# Altium PCB atmegashied.PcbDoc
Units mil, origin at the board's own origin, x right, y up, seen from the top; angles counter-clockwise.
Board outline 1930 x 2465 mil, 2 copper layers (Top Layer, Bottom Layer); 112 components, 70 nets, 712 pads, 0 vias.
Unrouted connection lines stored in the file: 2.
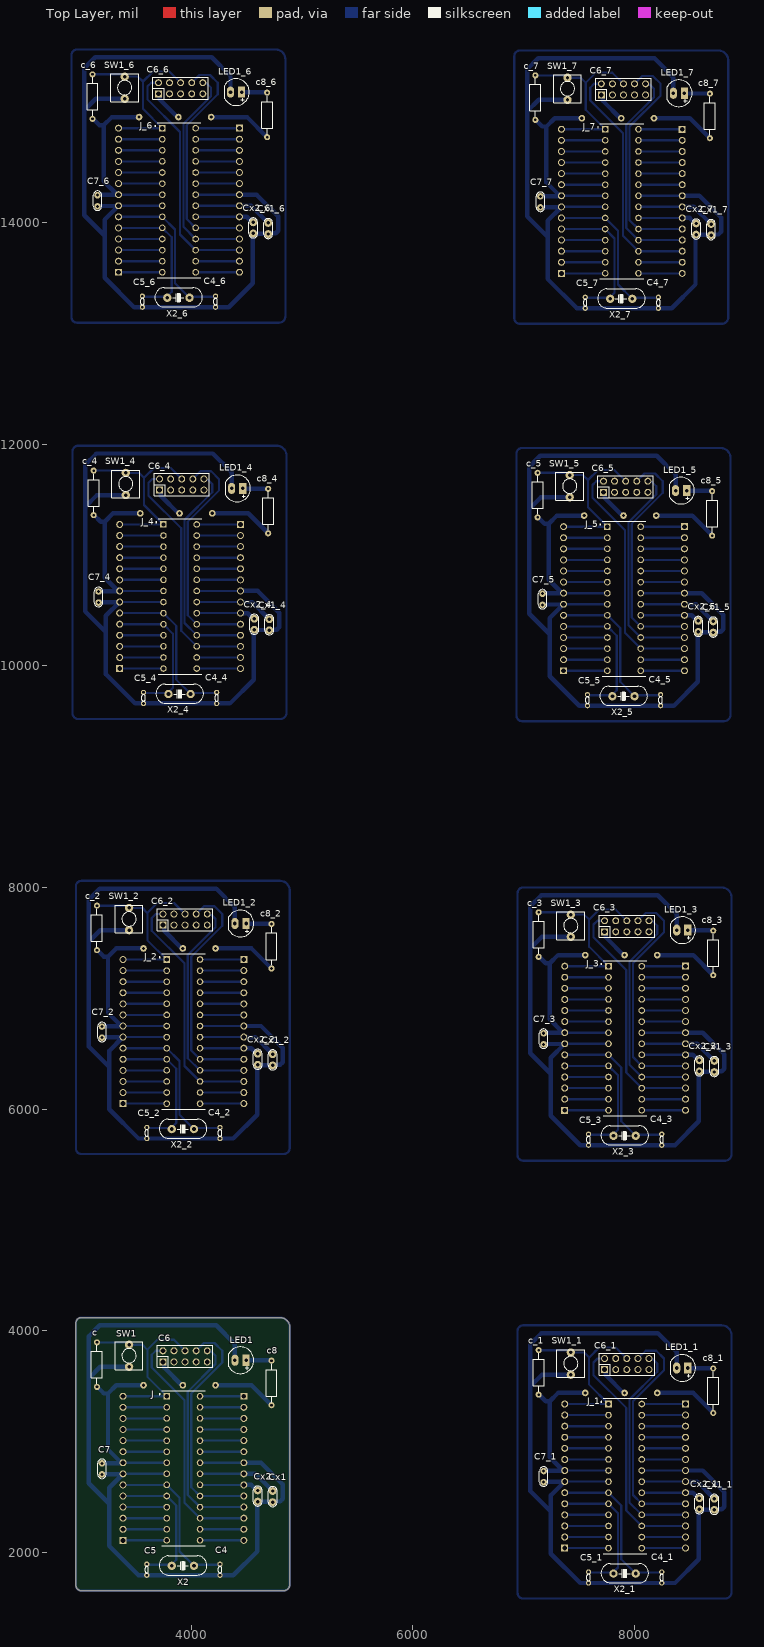
[diagram p0: Top Layer view]
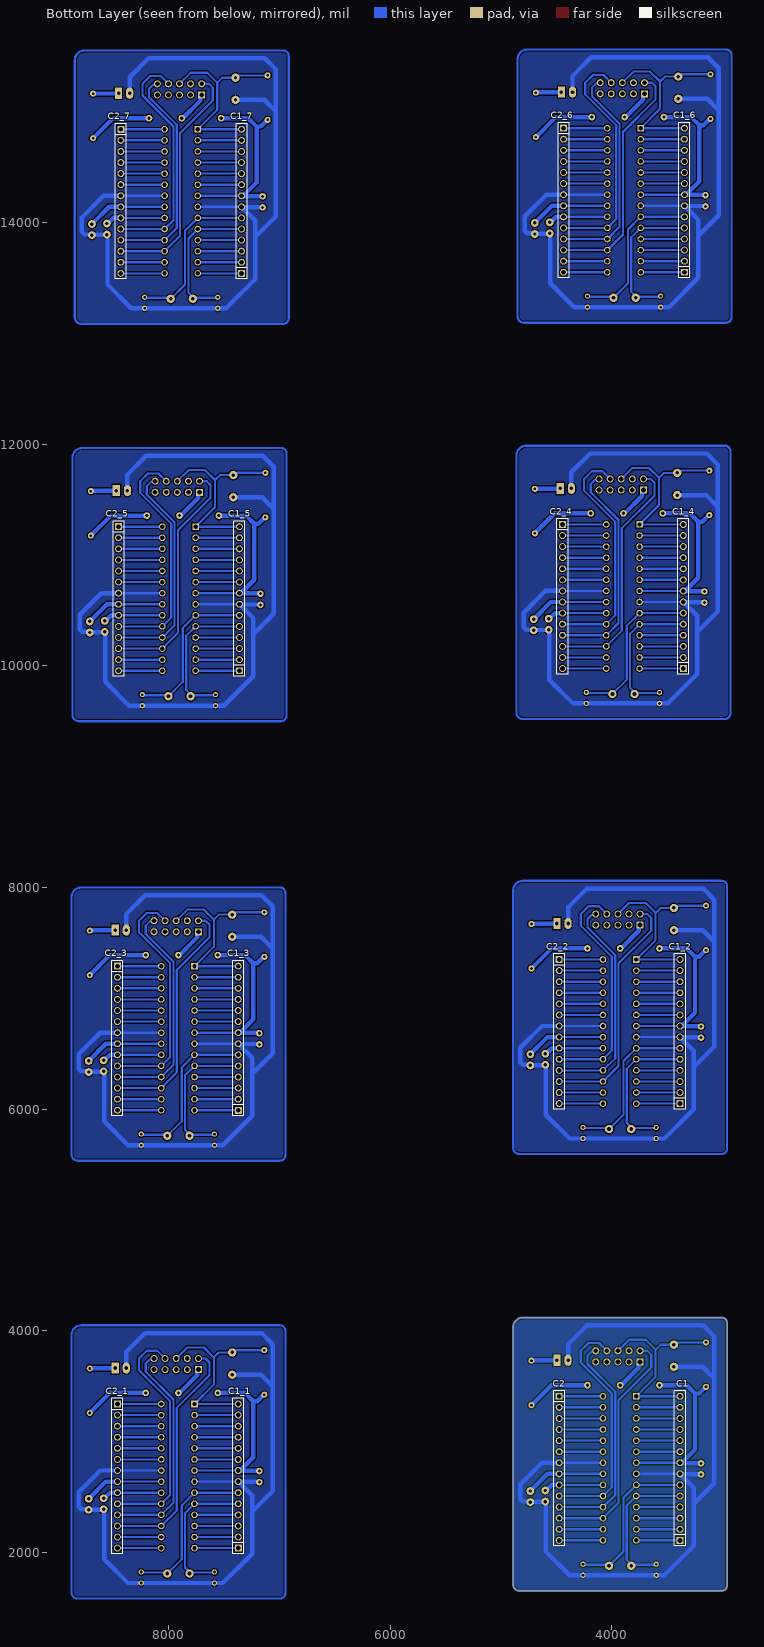
[diagram p1: Bottom Layer view, seen from below]

## Layer stack, top to bottom
Top Solder: solder mask 0.4, Solder Resist, Dk 3.5
Top Layer: signal copper 1.4
Dielectric 1: dielectric 12.6, FR-4, Dk 4.8
Bottom Layer: signal copper 1.4
Bottom Solder: solder mask 0.4, Solder Resist, Dk 3.5

## Board outline
2960,1705 ccw(c3010,1705) 3010,1655 4832.6,1655 ccw(c4832.6,1712.4) 4890,1712.4 4890,4030.51 ccw(c4800.52,4030.51) 4800.52,4119.99 3010,4120 ccw(c3010,4070) 2960,4070

## Design rules (kind name [scope] priority, off if disabled: settings)
Clearance [All] p1: gap=10 ignorepadtopadclearanceinfootprint=FALSE except(0: Arc-Hole Track-Hole SMDPad-Hole THPad-Hole Via-Hole Fill-Hole Poly-Hole Region-Hole Text-Hole)
PolygonConnect [All] p1: connectstyle=Relief reliefconductorwidth=10 reliefentries=4 polygonreliefangle="90 Angle" airgapwidth=10
RoutingVias [All] p1: holewidth=28 width=50 viastyle="Through Hole" minholewidth=28 minwidth=50 maxholewidth=28 maxwidth=50
SolderMaskExpansion [All] p1: expansion=4 istentingtop=FALSE
Width [All] p1: maxlimit=10 minlimit=10 preferedwidth=10
30 further rules are at their usual default settings.

## Classes and differential pairs
component class Tien: c C1 C2 C4 C5 C6 C7 c8 Cx1 Cx2 J LED1 SW1 X2

## Components (designator, comment, footprint, x,y, rotation, side; value= is the part's Value field where it differs from the comment)
c "100K" "tro vach 1/4w" 3150,3695 r270 top
C1 "JP14" JP14-D1T 3385,2110 r90 bottom
C1_1 "JP14" JP14-D1T 7370,2040 r90 bottom (schematic designator C1)
C1_2 "JP14" JP14-D1T 3385,6050 r90 bottom (schematic designator C1)
C1_3 "JP14" JP14-D1T 7370,5990 r90 bottom (schematic designator C1)
C1_4 "JP14" JP14-D1T 3355,9975 r90 bottom (schematic designator C1)
C1_5 "JP14" JP14-D1T 7360,9955 r90 bottom (schematic designator C1)
C1_6 "JP14" JP14-D1T 3345,13550 r90 bottom (schematic designator C1)
C1_7 "JP14" JP14-D1T 7340,13540 r90 bottom (schematic designator C1)
C2 "JP14" JP14-D1T 4475,3410 r270 bottom
C2_1 "JP14" JP14-D1T 8460,3340 r270 bottom (schematic designator C2)
C2_2 "JP14" JP14-D1T 4475,7350 r270 bottom (schematic designator C2)
C2_3 "JP14" JP14-D1T 8460,7290 r270 bottom (schematic designator C2)
C2_4 "JP14" JP14-D1T 4445,11275 r270 bottom (schematic designator C2)
C2_5 "JP14" JP14-D1T 8450,11255 r270 bottom (schematic designator C2)
C2_6 "JP14" JP14-D1T 4435,14850 r270 bottom (schematic designator C2)
C2_7 "JP14" JP14-D1T 8430,14840 r270 bottom (schematic designator C2)
C4 "MH" Tu-pico 4260,1895 r270 top value=33p
C4_1 "MH" Tu-pico 8245,1825 r270 top value=33p (schematic designator C4)
C4_2 "MH" Tu-pico 4260,5835 r270 top value=33p (schematic designator C4)
C4_3 "MH" Tu-pico 8245,5775 r270 top value=33p (schematic designator C4)
C4_4 "MH" Tu-pico 4230,9760 r270 top value=33p (schematic designator C4)
C4_5 "MH" Tu-pico 8235,9740 r270 top value=33p (schematic designator C4)
C4_6 "MH" Tu-pico 4220,13335 r270 top value=33p (schematic designator C4)
C4_7 "MH" Tu-pico 8215,13325 r270 top value=33p (schematic designator C4)
C5 "MH" Tu-pico 3600,1895 r270 top value=33p
C5_1 "MH" Tu-pico 7585,1825 r270 top value=33p (schematic designator C5)
C5_2 "MH" Tu-pico 3600,5835 r270 top value=33p (schematic designator C5)
C5_3 "MH" Tu-pico 7585,5775 r270 top value=33p (schematic designator C5)
C5_4 "MH" Tu-pico 3570,9760 r270 top value=33p (schematic designator C5)
C5_5 "MH" Tu-pico 7575,9740 r270 top value=33p (schematic designator C5)
C5_6 "MH" Tu-pico 3560,13335 r270 top value=33p (schematic designator C5)
C5_7 "MH" Tu-pico 7555,13325 r270 top value=33p (schematic designator C5)
C6 "JP5x2" JP5-D2T 3945,3770 r0 top
C6_1 "JP5x2" JP5-D2T 7930,3700 r0 top (schematic designator C6)
C6_2 "JP5x2" JP5-D2T 3945,7710 r0 top (schematic designator C6)
C6_3 "JP5x2" JP5-D2T 7930,7650 r0 top (schematic designator C6)
C6_4 "JP5x2" JP5-D2T 3915,11635 r0 top (schematic designator C6)
C6_5 "JP5x2" JP5-D2T 7920,11615 r0 top (schematic designator C6)
C6_6 "JP5x2" JP5-D2T 3905,15210 r0 top (schematic designator C6)
C6_7 "JP5x2" JP5-D2T 7900,15200 r0 top (schematic designator C6)
C7 "104" "tu gom" 3195,2755 r270 top
C7_1 "104" "tu gom" 7180,2685 r270 top (schematic designator C7)
C7_2 "104" "tu gom" 3195,6695 r270 top (schematic designator C7)
C7_3 "104" "tu gom" 7180,6635 r270 top (schematic designator C7)
C7_4 "104" "tu gom" 3165,10620 r270 top (schematic designator C7)
C7_5 "104" "tu gom" 7170,10600 r270 top (schematic designator C7)
C7_6 "104" "tu gom" 3155,14195 r270 top (schematic designator C7)
C7_7 "104" "tu gom" 7150,14185 r270 top (schematic designator C7)
c8 "1K" "tro vach 1/4w" 4725,3530 r270 top
c8_1 "1K" "tro vach 1/4w" 8710,3460 r270 top (schematic designator c8)
c8_2 "1K" "tro vach 1/4w" 4725,7470 r270 top (schematic designator c8)
c8_3 "1K" "tro vach 1/4w" 8710,7410 r270 top (schematic designator c8)
c8_4 "1K" "tro vach 1/4w" 4695,11395 r270 top (schematic designator c8)
c8_5 "1K" "tro vach 1/4w" 8700,11375 r270 top (schematic designator c8)
c8_6 "1K" "tro vach 1/4w" 4685,14970 r270 top (schematic designator c8)
c8_7 "1K" "tro vach 1/4w" 8680,14960 r270 top (schematic designator c8)
c_1 "100K" "tro vach 1/4w" 7135,3625 r270 top (schematic designator c)
c_2 "100K" "tro vach 1/4w" 3150,7635 r270 top (schematic designator c)
c_3 "100K" "tro vach 1/4w" 7135,7575 r270 top (schematic designator c)
c_4 "100K" "tro vach 1/4w" 3120,11560 r270 top (schematic designator c)
c_5 "100K" "tro vach 1/4w" 7125,11540 r270 top (schematic designator c)
c_6 "100K" "tro vach 1/4w" 3110,15135 r270 top (schematic designator c)
c_7 "100K" "tro vach 1/4w" 7105,15125 r270 top (schematic designator c)
Cx1 "104" CN1 4735,2505 r270 top value=33pF
Cx1_1 "104" CN1 8720,2435 r270 top value=33pF (schematic designator Cx1)
Cx1_2 "104" CN1 4735,6445 r270 top value=33pF (schematic designator Cx1)
Cx1_3 "104" CN1 8720,6385 r270 top value=33pF (schematic designator Cx1)
Cx1_4 "104" CN1 4705,10370 r270 top value=33pF (schematic designator Cx1)
Cx1_5 "104" CN1 8710,10350 r270 top value=33pF (schematic designator Cx1)
Cx1_6 "104" CN1 4695,13945 r270 top value=33pF (schematic designator Cx1)
Cx1_7 "104" CN1 8690,13935 r270 top value=33pF (schematic designator Cx1)
Cx2 "104" CN1 4600,2510 r270 top value=33pF
Cx2_1 "104" CN1 8585,2440 r270 top value=33pF (schematic designator Cx2)
Cx2_2 "104" CN1 4600,6450 r270 top value=33pF (schematic designator Cx2)
Cx2_3 "104" CN1 8585,6390 r270 top value=33pF (schematic designator Cx2)
Cx2_4 "104" CN1 4570,10375 r270 top value=33pF (schematic designator Cx2)
Cx2_5 "104" CN1 8575,10355 r270 top value=33pF (schematic designator Cx2)
Cx2_6 "104" CN1 4560,13950 r270 top value=33pF (schematic designator Cx2)
Cx2_7 "104" CN1 8555,13940 r270 top value=33pF (schematic designator Cx2)
J "1-2199298-9" DIP762W60P254L3556H510Q28 3930,2760 r0 top
J_1 "1-2199298-9" DIP762W60P254L3556H510Q28 7915,2690 r0 top (schematic designator J)
J_2 "1-2199298-9" DIP762W60P254L3556H510Q28 3930,6700 r0 top (schematic designator J)
J_3 "1-2199298-9" DIP762W60P254L3556H510Q28 7915,6640 r0 top (schematic designator J)
J_4 "1-2199298-9" DIP762W60P254L3556H510Q28 3900,10625 r0 top (schematic designator J)
J_5 "1-2199298-9" DIP762W60P254L3556H510Q28 7905,10605 r0 top (schematic designator J)
J_6 "1-2199298-9" DIP762W60P254L3556H510Q28 3890,14200 r0 top (schematic designator J)
J_7 "1-2199298-9" DIP762W60P254L3556H510Q28 7885,14190 r0 top (schematic designator J)
LED1 "LED" LED-5-RED 4495,3735 r180 top value="LED 3 ly Single Colour"
LED1_1 "LED" LED-5-RED 8480,3665 r180 top value="LED 3 ly Single Colour" (schematic designator LED1)
LED1_2 "LED" LED-5-RED 4495,7675 r180 top value="LED 3 ly Single Colour" (schematic designator LED1)
LED1_3 "LED" LED-5-RED 8480,7615 r180 top value="LED 3 ly Single Colour" (schematic designator LED1)
LED1_4 "LED" LED-5-RED 4465,11600 r180 top value="LED 3 ly Single Colour" (schematic designator LED1)
LED1_5 "LED" LED-5-RED 8470,11580 r180 top value="LED 3 ly Single Colour" (schematic designator LED1)
LED1_6 "LED" LED-5-RED 4455,15175 r180 top value="LED 3 ly Single Colour" (schematic designator LED1)
LED1_7 "LED" LED-5-RED 8450,15165 r180 top value="LED 3 ly Single Colour" (schematic designator LED1)
SW1 "" SW2 3440,3875 r270 top
SW1_1 "" SW2 7425,3805 r270 top (schematic designator SW1)
SW1_2 "" SW2 3440,7815 r270 top (schematic designator SW1)
SW1_3 "" SW2 7425,7755 r270 top (schematic designator SW1)
SW1_4 "" SW2 3410,11740 r270 top (schematic designator SW1)
SW1_5 "" SW2 7415,11720 r270 top (schematic designator SW1)
SW1_6 "" SW2 3400,15315 r270 top (schematic designator SW1)
SW1_7 "" SW2 7395,15305 r270 top (schematic designator SW1)
X2 "16Mhz" XT2 3925,1880 r0 top value=4Mhz
X2_1 "16Mhz" XT2 7910,1810 r0 top value=4Mhz (schematic designator X2)
X2_2 "16Mhz" XT2 3925,5820 r0 top value=4Mhz (schematic designator X2)
X2_3 "16Mhz" XT2 7910,5760 r0 top value=4Mhz (schematic designator X2)
X2_4 "16Mhz" XT2 3895,9745 r0 top value=4Mhz (schematic designator X2)
X2_5 "16Mhz" XT2 7900,9725 r0 top value=4Mhz (schematic designator X2)
X2_6 "16Mhz" XT2 3885,13320 r0 top value=4Mhz (schematic designator X2)
X2_7 "16Mhz" XT2 7880,13310 r0 top value=4Mhz (schematic designator X2)

## Footprints (in the part's own frame and the unit in brackets; to place one, negate y for a bottom-side part, rotate by r counter-clockwise, add the part's x,y. Pads: shape width x height; smd on the part's side, far side on the other; paste and mask are expansions set on the pad)
CN1 [mil]
  round 70 hole 31: 1(-50,0) 2(50,0)
  silkscreen extent -90,-40 91,40, body extent -115,-33 115,33, height 265
DIP762W60P254L3556H510Q28 [mm]
  rect 1.508x1.508 hole 1: 1(-3.81,16.51)
  round 1.508 hole 1: 2(-3.81,13.97) 3(-3.81,11.43) 4(-3.81,8.89) 5(-3.81,6.35) 6(-3.81,3.81) 7(-3.81,1.27) 8(-3.81,-1.27) 9(-3.81,-3.81) 10(-3.81,-6.35) 11(-3.81,-8.89) 12(-3.81,-11.43) 13(-3.81,-13.97) 14(-3.81,-16.51) 15(3.81,-16.51) 16(3.81,-13.97) 17(3.81,-11.43) 18(3.81,-8.89) 19(3.81,-6.35) 20(3.81,-3.81) 21(3.81,-1.27) 22(3.81,1.27) 23(3.81,3.81) 24(3.81,6.35) 25(3.81,8.89) 26(3.81,11.43) 27(3.81,13.97) 28(3.81,16.51)
  silkscreen extent -5.55,-17.78 5,17.78, body extent -4.87,-17.78 5.13,17.78, height 5
JP5-D2T [mm] "10 pins, dual pin, straight, gold plating"
  rect 1.6x1.6 hole 1.1: 1(-5.08,-1.27)
  round 1.6 hole 1.1: 2(-2.54,-1.27) 3(0,-1.27) 4(2.54,-1.27) 5(5.08,-1.27) 6(5.08,1.27) 7(2.54,1.27) 8(0,1.27) 9(-2.54,1.27) 10(-5.08,1.27)
  silkscreen extent -6.35,-2.54 6.35,2.54, body extent -6.35,-2.54 6.35,2.54, height 8.55
JP14-D1T [mm] "14 pins, 1 row, straight, gold plating"
  rect 1.6x1.6 hole 1.1: 1(0,0)
  round 1.6 hole 1.1: 2(2.54,0) 3(5.08,0) 4(7.62,0) 5(10.16,0) 6(12.7,0) 7(15.24,0) 8(17.78,0) 9(20.32,0) 10(22.86,0) 11(25.4,0) 12(27.94,0) 13(30.48,0) 14(33.02,0)
  silkscreen extent -1.27,-1.27 34.29,1.27, body extent -1.27,-1.27 34.29,1.27, height 8.54
LED-5-RED [mil] "LED 2 PIN, 5 ly , Only colour,pin to pin 100mil"
  rect 65x100 hole 32: 1(0,0)
  oval 65x100 hole 32: 2(100,0)
  silkscreen extent -70,-120 154,120, body extent -65,-119 149,118, height 339
SW2 [mil] "SW button 2pin, 250x 250 mil"
  round 75 hole 31: 1(0,0) 2(200,0)
  silkscreen extent -25,-125 225,125
"tro vach 1/4w" [mm]
  round 1.4 hole 0.6: 1(-5.1,0) 2(5.1,0)
  silkscreen extent -4.39,-1.25 4.42,1.25, body extent -5.38,-1.2 5.38,1.2, height 2.41
"tu gom" [mm] "Tu gom mini"
  round 1.5 hole 0.7: 1(-1.27,0) 2(1.27,0)
  silkscreen extent -2.25,-0.97 2.22,0.97, body extent -2.92,-0.85 2.92,0.85, height 6.12
Tu-pico [mm] "Tu gom mini"
  round 1.2 hole 0.6: 1(0,0) 2(2.54,0)
  silkscreen extent 0.51,-0.38 2.03,0.38, body extent -1.65,-0.85 4.19,0.85, height 6.12
XT2 [mil] "Footpin for Crystal 2 pin"
  round 75 hole 34: 1(-100,0) 2(100,0)
  silkscreen extent -213,-83 217,90, body extent -216,-87 216,90, height 144

## Part data
c c8 c8_1 c8_2 c8_3 c8_4 c8_5 c8_6 c8_7 c_1 c_2 c_3 c_4 c_5 c_6 c_7: library part "Tro Vach 1/4W 5% 10k", "Căm", Chung_Loai=Cắm, Don_Vi=Con, Ma_Hang=MH007354, So_Chan=2, Ten_Linh_Kien="Trở Vạch 1/4w 5% 10K"
C1 C1_1 C1_2 C1_3 C1_4 C1_5 C1_6 C1_7 C2 C2_1 C2_2 C2_3 C2_4 C2_5 C2_6 C2_7: "WR-PHD 2.54 mm Angled Socket Header", Manufacturer="W¨¹rth Elektronik eiSos GmbH", partNo=613014143121, ComponentLink1 Description=Manufacturer, ComponentLink1URL=http://www.we-online.com, ComponentLink2 Description=Datasheet, ComponentLink2URL=http://katalog.we-online.de/em/datasheet/6130xx143121.pdf, Created by="Karrer Zheng", Created Date="29 March 2013", NoPins=14
C4 C4_1 C4_2 C4_3 C4_4 C4_5 C4_6 C4_7 C5 C5_1 C5_2 C5_3 C5_4 C5_5 C5_6 C5_7: library part "Tu 33pF", "Cắm"
C6 C6_1 C6_2 C6_3 C6_4 C6_5 C6_6 C6_7: "WR-PHD 2.54 mm Dual Socket Header", Manufacturer="W¨¹rth Elektronik eiSos GmbH", partNo=61301021821, ComponentLink1 Description=Manufacturer, ComponentLink1URL=http://www.we-online.com, ComponentLink2 Description=Datasheet, ComponentLink2URL=http://katalog.we-online.de/em/datasheet/6130xx21821.pdf, Created by="Karrer Zheng", Created Date="29 March 2013", NoPins=10
C7 C7_1 C7_2 C7_3 C7_4 C7_5 C7_6 C7_7: library part "Tu gom 104 50V", "Cắm", Chung_Loai=Cắm, Don_Vi=Con, Ma_Hang=MH004761, So_Chan=2, Ten_Linh_Kien="Tụ gốm 104 100nF 50V"
Cx1 Cx1_1 Cx1_2 Cx1_3 Cx1_4 Cx1_5 Cx1_6 Cx1_7 Cx2 Cx2_1 Cx2_2 Cx2_3 Cx2_4 Cx2_5 Cx2_6 Cx2_7: library part CN0, "Cremic For Xtal 1pF => 100pF"
J J_1 J_2 J_3 J_4 J_5 J_6 J_7: "28P,DIP SKT,300 CL,LDR,PB FREE", Package="PDIP-28 TE Connectivity", Centerline_Pitch="2.54 mm[.1 in]", ComponentLink1Description="New link", Digi-Key_Part_Number=A120353-ND, EU_RoHS_Compliance=Compliant, MF="TE Connectivity", MP=1-2199298-9, Number_of_Positions=28, Product_Type=Socket, SnapEDA_Link=https://www.snapeda.com/parts/1-2199298-9/TE%20Connectivity%20AMP%20Connectors/view-part/1265789/?ref=snap
LED1 LED1_1 LED1_2 LED1_3 LED1_4 LED1_5 LED1_6 LED1_7: "LED Single colour Green and Red"
SW1 SW1_1 SW1_2 SW1_3 SW1_4 SW1_5 SW1_6 SW1_7: library part "Nut Nhan 2 Chan ( Dip )", "Cắm", Chung_Loai=Cắm, Don_Vi=Con, Ma_Hang=MH001959, Ten_Linh_Kien="Nút Nhấn 2 Chân 6x6x5MM DIP"
X2 X2_1 X2_2 X2_3 X2_4 X2_5 X2_6 X2_7: library part XT2, "Crystal, 32.768 KHz, -40 to 85 degC, 3.2 x 1.5 x 0.9 mm SMD"

## Free pads (board coordinates)
  round 60 hole 30: 4(3530,14950) 4(3540,11375) 4(3570,3510) 4(3570,7450) 4(7525,14940) 4(7545,11355) 4(7555,3440) 4(7555,7390) 5(3885,14950) 5(3895,11375) 5(3925,3510) 5(3925,7450) 5(4180,14950) 5(4190,11375) 5(4220,3510) 5(4220,7450) 5(7880,14940) 5(7900,11355) 5(7910,3440) 5(7910,7390) 5(8175,14940) 5(8195,11355) 5(8205,3440) 5(8205,7390)

## Nets (pads, with @x,y where several pads share a name; then routed paths per layer and width w, separated by ;. In a path a pad name is that pad's centre, name@x,y a point inside that pad or via, vN(x,y) a via of type N, cw(c..) or ccw(c..) an arc to the next point about the centre after c; other vN are vias at no path point)
NetBT1_1: 
NetBT1_2: 
NetC1_1: C1.1 J.14 | length 395
  Bottom Layer w20: C1.1 J.14
NetC1_2: C1.2 J.13 | length 395
  Bottom Layer w20: C1.2 J.13
NetC1_3: C1.3 J.12 | length 395
  Bottom Layer w20: C1.3 J.12
NetC1_4: C1.4 J.11 | length 395
  Bottom Layer w20: C1.4 J.11
NetC1_5: C1.5 C5.1 J.10 X2.1 | length 1308
  Bottom Layer w20: C1.5 J.10 3865,2425 3865,1934.88 3825,1894.88 X2.1 3815.21,1889.79 3605.21,1889.79 C5.1
NetC1_6: C1.6 C4.1 J.9 X2.2 | length 1467.7
  Bottom Layer w20: C1.6 J.9 3895,2495 3895,2010 X2.2 4034.79,1889.79 4254.79,1889.79 C4.1
NetC1_7: C1.7 C2.7 C4.2 C5.2 C6.5 C7.2 Cx1.2 Cx2.2 J.8 J.22 LED1.2 SW1.2 | length 8040
  Bottom Layer w20: C1.7 J.8 ; J.22 C2.7
  Bottom Layer w40: C7.2 3197.5,2707.5 C1.7@3382.5,2707.5 ; C1.7 C1.7@3382.5,2707.5 ; SW1.2 3180,3675 3075,3570 ; LED1.2 4395,3880 4225,4050 3175,4050 3075,3950 3075,3570 ; C2.7 4630,2810 4825.74,2614.26 4825.74,2484.17 4802.31,2460.74 4740.74,2460.74 Cx1.2 4732.5,2457.5 4602.5,2457.5 Cx2.2 4595,2455 4595,2010 4380,1795 C4.2 C5.2 3525,1795 3260,2060 3260,2440 ; 3075,3570 3075,2625 3260,2440 ; 3260,2440 3260,2585 C1.7@3382.5,2707.5
NetC1_8: C1.8 C6.1 C7.1 c8.2 c.2 J.7 | length 2636.8
  Bottom Layer w20: C1.8 J.7
  Bottom Layer w40: c.2 3154.09,3494.21 3213.3,3435 3250,3435 ; C7.1 3197.5,2807.5 3382.5,2807.5 C1.8 3378.78,2810 3367.28,2821.5 3358.5,2821.5 3250,2930 3250,3435 ; 3570,3510 3325,3510 3250,3435 ; C6.1 3756.5,3708.5 3756.5,3668.5 3925,3500 3925,3510 ; 4220,3510 4544.21,3510 c8.2
NetC1_9: C1.9 J.6 | length 395
  Bottom Layer w20: C1.9 J.6
NetC1_10: C1.10 J.5 | length 395
  Bottom Layer w20: C1.10 J.5
NetC1_11: C1.11 J.4 | length 395
  Bottom Layer w20: C1.11 J.4
NetC1_12: C1.12 J.3 | length 395
  Bottom Layer w20: C1.12 J.3
NetC1_13: C1.13 J.2 | length 395
  Bottom Layer w20: C1.13 J.2
NetC1_14: C1.14 C6.8 c.1 J.1 SW1.1 | length 1788.4
  Bottom Layer w20: c.1 3404.33,3895.79 3425.12,3875 SW1.1 3560,3875 3605,3830 ; C1.14 J.1 3605,3585 3605,3830 ; C6.8 3845,3920 3695,3920 3605,3830
NetC2_1: C2.1 J.28 | length 395
  Bottom Layer w20: J.28 C2.1
NetC2_2: C2.2 J.27 | length 395
  Bottom Layer w20: J.27 C2.2
NetC2_3: C2.3 J.26 | length 395
  Bottom Layer w20: J.26 C2.3
NetC2_4: C2.4 J.25 | length 395
  Bottom Layer w20: J.25 C2.4
NetC2_5: C2.5 J.24 | length 395
  Bottom Layer w20: J.24 C2.5
NetC2_6: C2.6 J.23 | length 395
  Bottom Layer w20: J.23 C2.6
NetC2_8: C2.8 Cx1.1 J.21 | length 719.2
  Bottom Layer w20: J.21 C2.8
  Bottom Layer w40: C2.8 4580,2710 Cx1.1
NetC2_9: C2.9 Cx2.1 J.20 | length 540.7
  Bottom Layer w20: J.20 C2.9 ; Cx2.1@4591.62,2560 Cx2.1
  Bottom Layer w40: C2.9 4541.62,2610 Cx2.1@4591.62,2560
NetC2_10: C2.10 C6.7 J.19 | length 2147.1
  Bottom Layer w20: C6.7 4115,3890 4210,3890 4280,3820 4280,3715 4000,3435 4000,2590 J.19 C2.10
NetC2_11: C2.11 C6.6 J.18 | length 2003
  Bottom Layer w20: C6.6 4153.23,3811.77 4183.63,3811.77 4220,3775.4 4220,3700 3970,3450 3970,2520 J.18 C2.11
NetC2_12: C2.12 C6.10 J.17 | length 2164.7
  Bottom Layer w20: C6.10 3680,3820 3645,3785 3645,3670 3940,3375 3940,2450 J.17 C2.12
NetC2_13: C2.13 J.16 | length 395
  Bottom Layer w20: J.16 C2.13
NetC2_14: C2.14 J.15 | length 395
  Bottom Layer w20: J.15 C2.14
NetC3_1: 
NetC3_2: 
NetC3_3: 
NetC3_4: 
NetC3_5: 
NetC3_6: 
NetC3_8: 
NetC3_9: 
NetC3_10: 
NetC3_11: 
NetC3_12: 
NetC3_13: 
NetC3_14: 
Netc8_1: c8.1 LED1.1 | length 231.7
  Bottom Layer w40: LED1.1 4497.11,3732.89 4722.89,3732.89 c8.1
NetC9_1: 
NetC9_2: 
NetC9_3: 
NetC9_4: 
NetC9_5: 
NetC9_6: 
NetC9_8: 
NetC9_10: 
NetC9_11: 
NetC9_12: 
NetC9_13: 
NetC9_14: 
NetC15_1: 
NetC15_2: 
NetC16_2: 
NetC17_2: 
NetC18_2: 
NetJ2_1: 
NetJ2_2: 
NetJP1_1: 
NetJP1_2: 
NetJP1_3: 
NetJP1_9: 
NetLED2_1: 
NetLED3_1: 
NetLED4_1: 
NetLED5_1: 
pads on no net: C1_1.1 C1_1.2 C1_1.3 C1_1.4 C1_1.5 C1_1.6 C1_1.7 C1_1.8 C1_1.9 C1_1.10 C1_1.11 C1_1.12 C1_1.13 C1_1.14 C1_2.1 C1_2.2 C1_2.3 C1_2.4 C1_2.5 C1_2.6 C1_2.7 C1_2.8 C1_2.9 C1_2.10 C1_2.11 C1_2.12 C1_2.13 C1_2.14 C1_3.1 C1_3.2 C1_3.3 C1_3.4 C1_3.5 C1_3.6 C1_3.7 C1_3.8 C1_3.9 C1_3.10 C1_3.11 C1_3.12 C1_3.13 C1_3.14 C1_4.1 C1_4.2 C1_4.3 C1_4.4 C1_4.5 C1_4.6 C1_4.7 C1_4.8 C1_4.9 C1_4.10 C1_4.11 C1_4.12 C1_4.13 C1_4.14 C1_5.1 C1_5.2 C1_5.3 C1_5.4 C1_5.5 C1_5.6 C1_5.7 C1_5.8 C1_5.9 C1_5.10 C1_5.11 C1_5.12 C1_5.13 C1_5.14 C1_6.1 C1_6.2 C1_6.3 C1_6.4 C1_6.5 C1_6.6 C1_6.7 C1_6.8 C1_6.9 C1_6.10 C1_6.11 C1_6.12 C1_6.13 C1_6.14 C1_7.1 C1_7.2 C1_7.3 C1_7.4 C1_7.5 C1_7.6 C1_7.7 C1_7.8 C1_7.9 C1_7.10 C1_7.11 C1_7.12 C1_7.13 C1_7.14 C2_1.1 C2_1.2 C2_1.3 C2_1.4 C2_1.5 C2_1.6 C2_1.7 C2_1.8 C2_1.9 C2_1.10 C2_1.11 C2_1.12 C2_1.13 C2_1.14 C2_2.1 C2_2.2 C2_2.3 C2_2.4 C2_2.5 C2_2.6 C2_2.7 C2_2.8 C2_2.9 C2_2.10 C2_2.11 C2_2.12 C2_2.13 C2_2.14 C2_3.1 C2_3.2 C2_3.3 C2_3.4 C2_3.5 C2_3.6 C2_3.7 C2_3.8 C2_3.9 C2_3.10 C2_3.11 C2_3.12 C2_3.13 C2_3.14 C2_4.1 C2_4.2 C2_4.3 C2_4.4 C2_4.5 C2_4.6 C2_4.7 C2_4.8 C2_4.9 C2_4.10 C2_4.11 C2_4.12 C2_4.13 C2_4.14 C2_5.1 C2_5.2 C2_5.3 C2_5.4 C2_5.5 C2_5.6 C2_5.7 C2_5.8 C2_5.9 C2_5.10 C2_5.11 C2_5.12 C2_5.13 C2_5.14 C2_6.1 C2_6.2 C2_6.3 C2_6.4 C2_6.5 C2_6.6 C2_6.7 C2_6.8 C2_6.9 C2_6.10 C2_6.11 C2_6.12 C2_6.13 C2_6.14 C2_7.1 C2_7.2 C2_7.3 C2_7.4 C2_7.5 C2_7.6 C2_7.7 C2_7.8 C2_7.9 C2_7.10 C2_7.11 C2_7.12 C2_7.13 C2_7.14 C4_1.1 C4_1.2 C4_2.1 C4_2.2 C4_3.1 C4_3.2 C4_4.1 C4_4.2 C4_5.1 C4_5.2 C4_6.1 C4_6.2 C4_7.1 C4_7.2 C5_1.1 C5_1.2 C5_2.1 C5_2.2 C5_3.1 C5_3.2 C5_4.1 C5_4.2 C5_5.1 C5_5.2 C5_6.1 C5_6.2 C5_7.1 C5_7.2 C6.2 C6.3 C6.4 C6.9 C6_1.1 C6_1.2 C6_1.3 C6_1.4 C6_1.5 C6_1.6 C6_1.7 C6_1.8 C6_1.9 C6_1.10 C6_2.1 C6_2.2 C6_2.3 C6_2.4 C6_2.5 C6_2.6 C6_2.7 C6_2.8 C6_2.9 C6_2.10 C6_3.1 C6_3.2 C6_3.3 C6_3.4 C6_3.5 C6_3.6 C6_3.7 C6_3.8 C6_3.9 C6_3.10 C6_4.1 C6_4.2 C6_4.3 C6_4.4 C6_4.5 C6_4.6 C6_4.7 C6_4.8 C6_4.9 C6_4.10 C6_5.1 C6_5.2 C6_5.3 C6_5.4 C6_5.5 C6_5.6 C6_5.7 C6_5.8 C6_5.9 C6_5.10 C6_6.1 C6_6.2 C6_6.3 C6_6.4 C6_6.5 C6_6.6 C6_6.7 C6_6.8 C6_6.9 C6_6.10 C6_7.1 C6_7.2 C6_7.3 C6_7.4 C6_7.5 C6_7.6 C6_7.7 C6_7.8 C6_7.9 C6_7.10 C7_1.1 C7_1.2 C7_2.1 C7_2.2 C7_3.1 C7_3.2 C7_4.1 C7_4.2 C7_5.1 C7_5.2 C7_6.1 C7_6.2 C7_7.1 C7_7.2 c8_1.1 c8_1.2 c8_2.1 c8_2.2 c8_3.1 c8_3.2 c8_4.1 c8_4.2 c8_5.1 c8_5.2 c8_6.1 c8_6.2 c8_7.1 c8_7.2 c_1.1 c_1.2 c_2.1 c_2.2 c_3.1 c_3.2 c_4.1 c_4.2 c_5.1 c_5.2 c_6.1 c_6.2 c_7.1 c_7.2 Cx1_1.1 Cx1_1.2 Cx1_2.1 Cx1_2.2 Cx1_3.1 Cx1_3.2 Cx1_4.1 Cx1_4.2 Cx1_5.1 Cx1_5.2 Cx1_6.1 Cx1_6.2 Cx1_7.1 Cx1_7.2 Cx2_1.1 Cx2_1.2 Cx2_2.1 Cx2_2.2 Cx2_3.1 Cx2_3.2 Cx2_4.1 Cx2_4.2 Cx2_5.1 Cx2_5.2 Cx2_6.1 Cx2_6.2 Cx2_7.1 Cx2_7.2 J_1.1 J_1.2 J_1.3 J_1.4 J_1.5 J_1.6 J_1.7 J_1.8 J_1.9 J_1.10 J_1.11 J_1.12 J_1.13 J_1.14 J_1.15 J_1.16 J_1.17 J_1.18 J_1.19 J_1.20 J_1.21 J_1.22 J_1.23 J_1.24 J_1.25 J_1.26 J_1.27 J_1.28 J_2.1 J_2.2 J_2.3 J_2.4 J_2.5 J_2.6 J_2.7 J_2.8 J_2.9 J_2.10 J_2.11 J_2.12 J_2.13 J_2.14 J_2.15 J_2.16 J_2.17 J_2.18 J_2.19 J_2.20 J_2.21 J_2.22 J_2.23 J_2.24 J_2.25 J_2.26 J_2.27 J_2.28 J_3.1 J_3.2 J_3.3 J_3.4 J_3.5 J_3.6 J_3.7 J_3.8 J_3.9 J_3.10 J_3.11 J_3.12 J_3.13 J_3.14 J_3.15 J_3.16 J_3.17 J_3.18 J_3.19 J_3.20 J_3.21 J_3.22 J_3.23 J_3.24 J_3.25 J_3.26 J_3.27 J_3.28 J_4.1 J_4.2 J_4.3 J_4.4 J_4.5 J_4.6 J_4.7 J_4.8 J_4.9 J_4.10 J_4.11 J_4.12 J_4.13 J_4.14 J_4.15 J_4.16 J_4.17 J_4.18 J_4.19 J_4.20 J_4.21 J_4.22 J_4.23 J_4.24 J_4.25 J_4.26 J_4.27 J_4.28 J_5.1 J_5.2 J_5.3 J_5.4 J_5.5 J_5.6 J_5.7 J_5.8 J_5.9 J_5.10 J_5.11 J_5.12 J_5.13 J_5.14 J_5.15 J_5.16 J_5.17 J_5.18 J_5.19 J_5.20 J_5.21 J_5.22 J_5.23 J_5.24 J_5.25 J_5.26 J_5.27 J_5.28 J_6.1 J_6.2 J_6.3 J_6.4 J_6.5 J_6.6 J_6.7 J_6.8 J_6.9 J_6.10 J_6.11 J_6.12 J_6.13 J_6.14 J_6.15 J_6.16 J_6.17 J_6.18 J_6.19 J_6.20 J_6.21 J_6.22 J_6.23 J_6.24 J_6.25 J_6.26 J_6.27 J_6.28 J_7.1 J_7.2 J_7.3 J_7.4 J_7.5 J_7.6 J_7.7 J_7.8 J_7.9 J_7.10 J_7.11 J_7.12 J_7.13 J_7.14 J_7.15 J_7.16 J_7.17 J_7.18 J_7.19 J_7.20 J_7.21 J_7.22 J_7.23 J_7.24 J_7.25 J_7.26 J_7.27 J_7.28 LED1_1.1 LED1_1.2 LED1_2.1 LED1_2.2 LED1_3.1 LED1_3.2 LED1_4.1 LED1_4.2 LED1_5.1 LED1_5.2 LED1_6.1 LED1_6.2 LED1_7.1 LED1_7.2 SW1_1.1 SW1_1.2 SW1_2.1 SW1_2.2 SW1_3.1 SW1_3.2 SW1_4.1 SW1_4.2 SW1_5.1 SW1_5.2 SW1_6.1 SW1_6.2 SW1_7.1 SW1_7.2 X2_1.1 X2_1.2 X2_2.1 X2_2.2 X2_3.1 X2_3.2 X2_4.1 X2_4.2 X2_5.1 X2_5.2 X2_6.1 X2_6.2 X2_7.1 X2_7.2
copper on no net: | length 277808.6
  Bottom Layer w19.68: 2920,13145 ccw(c2970,13145) 2970,13095 4792.6,13095 ccw(c4792.6,13152.4) 4850,13152.4 4850,15470.51 ccw(c4760.52,15470.51) 4760.52,15559.99 2970,15560 ccw(c2970,15510) 2920,15510 2920,13145 ; 2930,9570 ccw(c2980,9570) 2980,9520 4802.6,9520 ccw(c4802.6,9577.4) 4860,9577.4 4860,11895.51 ccw(c4770.52,11895.51) 4770.52,11984.99 2980,11985 ccw(c2980,11935) 2930,11935 2930,9570 ; 2960,1705 ccw(c3010,1705) 3010,1655 4832.6,1655 ccw(c4832.6,1712.4) 4890,1712.4 4890,4030.51 ccw(c4800.52,4030.51) 4800.52,4119.99 3010,4120 ccw(c3010,4070) 2960,4070 2960,1705 ; 2960,5645 ccw(c3010,5645) 3010,5595 4832.6,5595 ccw(c4832.6,5652.4) 4890,5652.4 4890,7970.51 ccw(c4800.52,7970.51) 4800.52,8059.99 3010,8060 ccw(c3010,8010) 2960,8010 2960,5645 ; 6915,13135 ccw(c6965,13135) 6965,13085 8787.6,13085 ccw(c8787.6,13142.4) 8845,13142.4 8845,15460.51 ccw(c8755.52,15460.51) 8755.52,15549.99 6965,15550 ccw(c6965,15500) 6915,15500 6915,13135 ; 6935,9550 ccw(c6985,9550) 6985,9500 8807.6,9500 ccw(c8807.6,9557.4) 8865,9557.4 8865,11875.51 ccw(c8775.52,11875.51) 8775.52,11964.99 6985,11965 ccw(c6985,11915) 6935,11915 6935,9550 ; 6945,1635 ccw(c6995,1635) 6995,1585 8817.6,1585 ccw(c8817.6,1642.4) 8875,1642.4 8875,3960.51 ccw(c8785.52,3960.51) 8785.52,4049.99 6995,4050 ccw(c6995,4000) 6945,4000 6945,1635 ; 6945,5585 ccw(c6995,5585) 6995,5535 8817.6,5535 ccw(c8817.6,5592.4) 8875,5592.4 8875,7910.51 ccw(c8785.52,7910.51) 8785.52,7999.99 6995,8000 ccw(c6995,7950) 6945,7950 6945,5585
  Bottom Layer w20: 3110,15335.79 3364.33,15335.79 3385.12,15315 3400,15315 3520,15315 3565,15270 ; 3120,11760.79 3374.33,11760.79 3395.12,11740 3410,11740 3530,11740 3575,11695 ; 3150,7835.79 3404.33,7835.79 3425.12,7815 3440,7815 3560,7815 3605,7770 ; 3345,13550 3740,13550 ; 3345,13650 3740,13650 ; 3345,13750 3740,13750 ; 3345,13850 3740,13850 ; 3345,13950 3740,13950 3825,13865 3825,13374.88 3785,13334.88 3785,13320 3775.21,13329.79 3565.21,13329.79 3560,13335 ; 3345,14050 3740,14050 3855,13935 3855,13450 3985,13320 3994.79,13329.79 4214.79,13329.79 4220,13335 ; 3345,14150 3740,14150 ; 3345,14250 3740,14250 ; 3345,14350 3740,14350 ; 3345,14450 3740,14450 ; 3345,14550 3740,14550 ; 3345,14650 3740,14650 ; 3345,14750 3740,14750 ; 3345,14850 3740,14850 3565,15025 3565,15270 ; 3355,9975 3750,9975 ; 3355,10075 3750,10075 ; 3355,10175 3750,10175 ; 3355,10275 3750,10275 ; 3355,10375 3750,10375 3835,10290 3835,9799.88 3795,9759.88 3795,9745 3785.21,9754.79 3575.21,9754.79 3570,9760 ; 3355,10475 3750,10475 3865,10360 3865,9875 3995,9745 4004.79,9754.79 4224.79,9754.79 4230,9760 ; 3355,10575 3750,10575 ; 3355,10675 3750,10675 ; 3355,10775 3750,10775 ; 3355,10875 3750,10875 ; 3355,10975 3750,10975 ; 3355,11075 3750,11075 ; 3355,11175 3750,11175 ; 3355,11275 3750,11275 3575,11450 3575,11695 ; 3385,6050 3780,6050 ; 3385,6150 3780,6150 ; 3385,6250 3780,6250 ; 3385,6350 3780,6350 ; 3385,6450 3780,6450 3865,6365 3865,5874.88 3825,5834.88 3825,5820 3815.21,5829.79 3605.21,5829.79 3600,5835 ; 3385,6550 3780,6550 3895,6435 3895,5950 4025,5820 4034.79,5829.79 4254.79,5829.79 4260,5835 ; 3385,6650 3780,6650 ; 3385,6750 3780,6750 ; 3385,6850 3780,6850 ; 3385,6950 3780,6950 ; 3385,7050 3780,7050 ; 3385,7150 3780,7150 ; 3385,7250 3780,7250 ; 3385,7350 3780,7350 3605,7525 3605,7770 ; 3705,15260 3640,15260 3605,15225 3605,15110 3900,14815 3900,13890 4040,13750 4435,13750 ; 3715,11685 3650,11685 3615,11650 3615,11535 3910,11240 3910,10315 4050,10175 4445,10175 ; 3745,7760 3680,7760 3645,7725 3645,7610 3940,7315 3940,6390 4080,6250 4475,6250 ; 3905,15260 3805,15360 3655,15360 3565,15270 ; 3915,11685 3815,11785 3665,11785 3575,11695 ; 3945,7760 3845,7860 3695,7860 3605,7770 ; 4005,15260 4075,15330 4170,15330 4240,15260 4240,15155 3960,14875 3960,14030 4040,13950 4435,13950 ; 4015,11685 4085,11755 4180,11755 4250,11685 4250,11580 3970,11300 3970,10455 4050,10375 4445,10375 ; 4040,13550 4435,13550 ; 4040,13650 4435,13650 ; 4040,14050 4435,14050 ; 4040,14150 4435,14150 ; 4040,14250 4435,14250 ; 4040,14350 4435,14350 ; 4040,14450 4435,14450 ; 4040,14550 4435,14550 ; 4040,14650 4435,14650 ; 4040,14750 4435,14750 ; 4040,14850 4435,14850 ; 4045,7760 4115,7830 4210,7830 4280,7760 4280,7655 4000,7375 4000,6530 4080,6450 4475,6450 ; 4050,9975 4445,9975 ; 4050,10075 4445,10075 ; 4050,10475 4445,10475 ; 4050,10575 4445,10575 ; 4050,10675 4445,10675 ; 4050,10775 4445,10775 ; 4050,10875 4445,10875 ; 4050,10975 4445,10975 ; 4050,11075 4445,11075 ; 4050,11175 4445,11175 ; 4050,11275 4445,11275 ; 4080,6050 4475,6050 ; 4080,6150 4475,6150 ; 4080,6550 4475,6550 ; 4080,6650 4475,6650 ; 4080,6750 4475,6750 ; 4080,6850 4475,6850 ; 4080,6950 4475,6950 ; 4080,7050 4475,7050 ; 4080,7150 4475,7150 ; 4080,7250 4475,7250 ; 4080,7350 4475,7350 ; 4105,15260 4113.23,15251.77 4143.63,15251.77 4180,15215.4 4180,15140 3930,14890 3930,13960 4040,13850 4435,13850 ; 4115,11685 4123.23,11676.77 4153.63,11676.77 4190,11640.4 4190,11565 3940,11315 3940,10385 4050,10275 4445,10275 ; 4145,7760 4153.23,7751.77 4183.63,7751.77 4220,7715.4 4220,7640 3970,7390 3970,6460 4080,6350 4475,6350 ; 4551.62,14000 4560,14000 ; 4561.62,10425 4570,10425 ; 4591.62,6500 4600,6500 ; 7105,15325.79 7359.33,15325.79 7380.12,15305 7395,15305 7515,15305 7560,15260 ; 7125,11740.79 7379.33,11740.79 7400.12,11720 7415,11720 7535,11720 7580,11675 ; 7135,3825.79 7389.33,3825.79 7410.12,3805 7425,3805 7545,3805 7590,3760 ; 7135,7775.79 7389.33,7775.79 7410.12,7755 7425,7755 7545,7755 7590,7710 ; 7340,13540 7735,13540 ; 7340,13640 7735,13640 ; 7340,13740 7735,13740 ; 7340,13840 7735,13840 ; 7340,13940 7735,13940 7820,13855 7820,13364.88 7780,13324.88 7780,13310 7770.21,13319.79 7560.21,13319.79 7555,13325 ; 7340,14040 7735,14040 7850,13925 7850,13440 7980,13310 7989.79,13319.79 8209.79,13319.79 8215,13325 ; 7340,14140 7735,14140 ; 7340,14240 7735,14240 ; 7340,14340 7735,14340 ; 7340,14440 7735,14440 ; 7340,14540 7735,14540 ; 7340,14640 7735,14640 ; 7340,14740 7735,14740 ; 7340,14840 7735,14840 7560,15015 7560,15260 ; 7360,9955 7755,9955 ; 7360,10055 7755,10055 ; 7360,10155 7755,10155 ; 7360,10255 7755,10255 ; 7360,10355 7755,10355 7840,10270 7840,9779.88 7800,9739.88 7800,9725 7790.21,9734.79 7580.21,9734.79 7575,9740 ; 7360,10455 7755,10455 7870,10340 7870,9855 8000,9725 8009.79,9734.79 8229.79,9734.79 8235,9740 ; 7360,10555 7755,10555 ; 7360,10655 7755,10655 ; 7360,10755 7755,10755 ; 7360,10855 7755,10855 ; 7360,10955 7755,10955 ; 7360,11055 7755,11055 ; 7360,11155 7755,11155 ; 7360,11255 7755,11255 7580,11430 7580,11675 ; 7370,2040 7765,2040 ; 7370,2140 7765,2140 ; 7370,2240 7765,2240 ; 7370,2340 7765,2340 ; 7370,2440 7765,2440 7850,2355 7850,1864.88 7810,1824.88 7810,1810 7800.21,1819.79 7590.21,1819.79 7585,1825 ; 7370,2540 7765,2540 7880,2425 7880,1940 8010,1810 8019.79,1819.79 8239.79,1819.79 8245,1825 ; 7370,2640 7765,2640 ; 7370,2740 7765,2740 ; 7370,2840 7765,2840 ; 7370,2940 7765,2940 ; 7370,3040 7765,3040 ; 7370,3140 7765,3140 ; 7370,3240 7765,3240 ; 7370,3340 7765,3340 7590,3515 7590,3760 ; 7370,5990 7765,5990 ; 7370,6090 7765,6090 ; 7370,6190 7765,6190 ; 7370,6290 7765,6290 ; 7370,6390 7765,6390 7850,6305 7850,5814.88 7810,5774.88 7810,5760 7800.21,5769.79 7590.21,5769.79 7585,5775 ; 7370,6490 7765,6490 7880,6375 7880,5890 8010,5760 8019.79,5769.79 8239.79,5769.79 8245,5775 ; 7370,6590 7765,6590 ; 7370,6690 7765,6690 ; 7370,6790 7765,6790 ; 7370,6890 7765,6890 ; 7370,6990 7765,6990 ; 7370,7090 7765,7090 ; 7370,7190 7765,7190 ; 7370,7290 7765,7290 7590,7465 7590,7710 ; 7700,15250 7635,15250 7600,15215 7600,15100 7895,14805 7895,13880 8035,13740 8430,13740 ; 7720,11665 7655,11665 7620,11630 7620,11515 7915,11220 7915,10295 8055,10155 8450,10155 ; 7730,3750 7665,3750 7630,3715 7630,3600 7925,3305 7925,2380 8065,2240 8460,2240 ; 7730,7700 7665,7700 7630,7665 7630,7550 7925,7255 7925,6330 8065,6190 8460,6190 ; 7900,15250 7800,15350 7650,15350 7560,15260 ; 7920,11665 7820,11765 7670,11765 7580,11675 ; 7930,3750 7830,3850 7680,3850 7590,3760 ; 7930,7700 7830,7800 7680,7800 7590,7710 ; 8000,15250 8070,15320 8165,15320 8235,15250 8235,15145 7955,14865 7955,14020 8035,13940 8430,13940 ; 8020,11665 8090,11735 8185,11735 8255,11665 8255,11560 7975,11280 7975,10435 8055,10355 8450,10355 ; 8030,3750 8100,3820 8195,3820 8265,3750 8265,3645 7985,3365 7985,2520 8065,2440 8460,2440 ; 8030,7700 8100,7770 8195,7770 8265,7700 8265,7595 7985,7315 7985,6470 8065,6390 8460,6390 ; 8035,13540 8430,13540 ; 8035,13640 8430,13640 ; 8035,14040 8430,14040 ; 8035,14140 8430,14140 ; 8035,14240 8430,14240 ; 8035,14340 8430,14340 ; 8035,14440 8430,14440 ; 8035,14540 8430,14540 ; 8035,14640 8430,14640 ; 8035,14740 8430,14740 ; 8035,14840 8430,14840 ; 8055,9955 8450,9955 ; 8055,10055 8450,10055 ; 8055,10455 8450,10455 ; 8055,10555 8450,10555 ; 8055,10655 8450,10655 ; 8055,10755 8450,10755 ; 8055,10855 8450,10855 ; 8055,10955 8450,10955 ; 8055,11055 8450,11055 ; 8055,11155 8450,11155 ; 8055,11255 8450,11255 ; 8065,2040 8460,2040 ; 8065,2140 8460,2140 ; 8065,2540 8460,2540 ; 8065,2640 8460,2640 ; 8065,2740 8460,2740 ; 8065,2840 8460,2840 ; 8065,2940 8460,2940 ; 8065,3040 8460,3040 ; 8065,3140 8460,3140 ; 8065,3240 8460,3240 ; 8065,3340 8460,3340 ; 8065,5990 8460,5990 ; 8065,6090 8460,6090 ; 8065,6490 8460,6490 ; 8065,6590 8460,6590 ; 8065,6690 8460,6690 ; 8065,6790 8460,6790 ; 8065,6890 8460,6890 ; 8065,6990 8460,6990 ; 8065,7090 8460,7090 ; 8065,7190 8460,7190 ; 8065,7290 8460,7290 ; 8100,15250 8108.23,15241.77 8138.63,15241.77 8175,15205.4 8175,15130 7925,14880 7925,13950 8035,13840 8430,13840 ; 8120,11665 8128.23,11656.77 8158.63,11656.77 8195,11620.4 8195,11545 7945,11295 7945,10365 8055,10255 8450,10255 ; 8130,3750 8138.23,3741.77 8168.63,3741.77 8205,3705.4 8205,3630 7955,3380 7955,2450 8065,2340 8460,2340 ; 8130,7700 8138.23,7691.77 8168.63,7691.77 8205,7655.4 8205,7580 7955,7330 7955,6400 8065,6290 8460,6290 ; 8546.62,13990 8555,13990 ; 8566.62,10405 8575,10405 ; 8576.62,2490 8585,2490 ; 8576.62,6440 8585,6440
  Bottom Layer w40: 3110,14934.21 3114.09,14934.21 3173.3,14875 3210,14875 ; 3120,11359.21 3124.09,11359.21 3183.3,11300 3220,11300 ; 3150,7434.21 3154.09,7434.21 3213.3,7375 3250,7375 ; 3155,14145 3157.5,14147.5 3342.5,14147.5 ; 3155,14245 3157.5,14247.5 3342.5,14247.5 3345,14250 3338.78,14250 3327.28,14261.5 3318.5,14261.5 3210,14370 3210,14875 ; 3165,10570 3167.5,10572.5 3352.5,10572.5 ; 3165,10670 3167.5,10672.5 3352.5,10672.5 3355,10675 3348.78,10675 3337.28,10686.5 3328.5,10686.5 3220,10795 3220,11300 ; 3195,6645 3197.5,6647.5 3382.5,6647.5 ; 3195,6745 3197.5,6747.5 3382.5,6747.5 3385,6750 3378.78,6750 3367.28,6761.5 3358.5,6761.5 3250,6870 3250,7375 ; 3345,14150 3342.5,14147.5 ; 3355,10575 3352.5,10572.5 ; 3385,6650 3382.5,6647.5 ; 3400,15115 3140,15115 3035,15010 ; 3410,11540 3150,11540 3045,11435 ; 3440,7615 3180,7615 3075,7510 ; 3530,14950 3285,14950 3210,14875 ; 3540,11375 3295,11375 3220,11300 ; 3570,7450 3325,7450 3250,7375 ; 3705,15160 3716.5,15148.5 3716.5,15108.5 3885,14940 3885,14950 ; 3715,11585 3726.5,11573.5 3726.5,11533.5 3895,11365 3895,11375 ; 3745,7660 3756.5,7648.5 3756.5,7608.5 3925,7440 3925,7450 ; 4180,14950 4504.21,14950 4685,14769.21 ; 4190,11375 4514.21,11375 4695,11194.21 ; 4220,7450 4544.21,7450 4725,7269.21 ; 4355,15175 4355,15320 4185,15490 3135,15490 3035,15390 3035,15010 ; 4365,11600 4365,11745 4195,11915 3145,11915 3045,11815 3045,11435 ; 4395,7675 4395,7820 4225,7990 3175,7990 3075,7890 3075,7510 ; 4435,14050 4501.62,14050 4551.62,14000 ; 4435,14150 4540,14150 4695,13995 ; 4435,14250 4590,14250 4785.74,14054.26 4785.74,13924.17 4762.31,13900.74 4700.74,13900.74 4695,13895 4692.5,13897.5 4562.5,13897.5 4560,13900 4555,13895 4555,13450 4340,13235 4220,13235 3560,13235 3485,13235 3220,13500 3220,13880 ; 4445,10475 4511.62,10475 4561.62,10425 ; 4445,10575 4550,10575 4705,10420 ; 4445,10675 4600,10675 4795.74,10479.26 4795.74,10349.17 4772.31,10325.74 4710.74,10325.74 4705,10320 4702.5,10322.5 4572.5,10322.5 4570,10325 4565,10320 4565,9875 4350,9660 4230,9660 3570,9660 3495,9660 3230,9925 3230,10305 ; 4455,15175 4457.11,15172.89 4682.89,15172.89 4685,15170.79 ; 4465,11600 4467.11,11597.89 4692.89,11597.89 4695,11595.79 ; 4475,6550 4541.62,6550 4591.62,6500 ; 4475,6650 4580,6650 4735,6495 ; 4475,6750 4630,6750 4825.74,6554.26 4825.74,6424.17 4802.31,6400.74 4740.74,6400.74 4735,6395 4732.5,6397.5 4602.5,6397.5 4600,6400 4595,6395 4595,5950 4380,5735 4260,5735 3600,5735 3525,5735 3260,6000 3260,6380 ; 4495,7675 4497.11,7672.89 4722.89,7672.89 4725,7670.79 ; 7105,14924.21 7109.09,14924.21 7168.3,14865 7205,14865 ; 7125,11339.21 7129.09,11339.21 7188.3,11280 7225,11280 ; 7135,3424.21 7139.09,3424.21 7198.3,3365 7235,3365 ; 7135,7374.21 7139.09,7374.21 7198.3,7315 7235,7315 ; 7150,14135 7152.5,14137.5 7337.5,14137.5 ; 7150,14235 7152.5,14237.5 7337.5,14237.5 7340,14240 7333.78,14240 7322.28,14251.5 7313.5,14251.5 7205,14360 7205,14865 ; 7170,10550 7172.5,10552.5 7357.5,10552.5 ; 7170,10650 7172.5,10652.5 7357.5,10652.5 7360,10655 7353.78,10655 7342.28,10666.5 7333.5,10666.5 7225,10775 7225,11280 ; 7180,2635 7182.5,2637.5 7367.5,2637.5 ; 7180,2735 7182.5,2737.5 7367.5,2737.5 7370,2740 7363.78,2740 7352.28,2751.5 7343.5,2751.5 7235,2860 7235,3365 ; 7180,6585 7182.5,6587.5 7367.5,6587.5 ; 7180,6685 7182.5,6687.5 7367.5,6687.5 7370,6690 7363.78,6690 7352.28,6701.5 7343.5,6701.5 7235,6810 7235,7315 ; 7340,14140 7337.5,14137.5 ; 7360,10555 7357.5,10552.5 ; 7370,2640 7367.5,2637.5 ; 7370,6590 7367.5,6587.5 ; 7395,15105 7135,15105 7030,15000 ; 7415,11520 7155,11520 7050,11415 ; 7425,3605 7165,3605 7060,3500 ; 7425,7555 7165,7555 7060,7450 ; 7525,14940 7280,14940 7205,14865 ; 7545,11355 7300,11355 7225,11280 ; 7555,3440 7310,3440 7235,3365 ; 7555,7390 7310,7390 7235,7315 ; 7700,15150 7711.5,15138.5 7711.5,15098.5 7880,14930 7880,14940 ; 7720,11565 7731.5,11553.5 7731.5,11513.5 7900,11345 7900,11355 ; 7730,3650 7741.5,3638.5 7741.5,3598.5 7910,3430 7910,3440 ; 7730,7600 7741.5,7588.5 7741.5,7548.5 7910,7380 7910,7390 ; 8175,14940 8499.21,14940 8680,14759.21 ; 8195,11355 8519.21,11355 8700,11174.21 ; 8205,3440 8529.21,3440 8710,3259.21 ; 8205,7390 8529.21,7390 8710,7209.21 ; 8350,15165 8350,15310 8180,15480 7130,15480 7030,15380 7030,15000 ; 8370,11580 8370,11725 8200,11895 7150,11895 7050,11795 7050,11415 ; 8380,3665 8380,3810 8210,3980 7160,3980 7060,3880 7060,3500 ; 8380,7615 8380,7760 8210,7930 7160,7930 7060,7830 7060,7450 ; 8430,14040 8496.62,14040 8546.62,13990 ; 8430,14140 8535,14140 8690,13985 ; 8430,14240 8585,14240 8780.74,14044.26 8780.74,13914.17 8757.31,13890.74 8695.74,13890.74 8690,13885 8687.5,13887.5 8557.5,13887.5 8555,13890 8550,13885 8550,13440 8335,13225 8215,13225 7555,13225 7480,13225 7215,13490 7215,13870 ; 8450,10455 8516.62,10455 8566.62,10405 ; 8450,10555 8555,10555 8710,10400 ; 8450,10655 8605,10655 8800.74,10459.26 8800.74,10329.17 8777.31,10305.74 8715.74,10305.74 8710,10300 8707.5,10302.5 8577.5,10302.5 8575,10305 8570,10300 8570,9855 8355,9640 8235,9640 7575,9640 7500,9640 7235,9905 7235,10285 ; 8450,15165 8452.11,15162.89 8677.89,15162.89 8680,15160.79 ; 8460,2540 8526.62,2540 8576.62,2490 ; 8460,2640 8565,2640 8720,2485 ; 8460,2740 8615,2740 8810.74,2544.26 8810.74,2414.17 8787.31,2390.74 8725.74,2390.74 8720,2385 8717.5,2387.5 8587.5,2387.5 8585,2390 8580,2385 8580,1940 8365,1725 8245,1725 7585,1725 7510,1725 7245,1990 7245,2370 ; 8460,6490 8526.62,6490 8576.62,6440 ; 8460,6590 8565,6590 8720,6435 ; 8460,6690 8615,6690 8810.74,6494.26 8810.74,6364.17 8787.31,6340.74 8725.74,6340.74 8720,6335 8717.5,6337.5 8587.5,6337.5 8585,6340 8580,6335 8580,5890 8365,5675 8245,5675 7585,5675 7510,5675 7245,5940 7245,6320 ; 8470,11580 8472.11,11577.89 8697.89,11577.89 8700,11575.79 ; 8480,3665 8482.11,3662.89 8707.89,3662.89 8710,3660.79 ; 8480,7615 8482.11,7612.89 8707.89,7612.89 8710,7610.79 ; 3035,15010 3035,14065 3220,13880 ; 3045,11435 3045,10490 3230,10305 ; 3075,7510 3075,6565 3260,6380 ; 3220,13880 3220,14025 3342.5,14147.5 ; 3230,10305 3230,10450 3352.5,10572.5 ; 3260,6380 3260,6525 3382.5,6647.5 ; 7030,15000 7030,14055 7215,13870 ; 7050,11415 7050,10470 7235,10285 ; 7060,3500 7060,2555 7245,2370 ; 7060,7450 7060,6505 7245,6320 ; 7215,13870 7215,14015 7337.5,14137.5 ; 7235,10285 7235,10430 7357.5,10552.5 ; 7245,2370 7245,2515 7367.5,2637.5 ; 7245,6320 7245,6465 7367.5,6587.5

## Polygon pours and split planes (outlines as drawn)
no net on Bottom Layer "gnd3" (solid, remove dead copper, pour order 8): 6965,13085 8787.6,13085 ccw(c8787.6,13142.4) 8845,13142.4 8845,15460.51 ccw(c8755.52,15460.51) 8755.52,15549.99 6964.99,15549.99 ccw(c6964.99,15500) 6915,15500 6915,13135 ccw(c6965,13135)
no net on Bottom Layer "gnd3" (solid, remove dead copper, pour order 7): 2970,13095 4792.6,13095 ccw(c4792.6,13152.4) 4850,13152.4 4850,15470.51 ccw(c4760.52,15470.51) 4760.52,15559.99 2969.99,15559.99 ccw(c2969.99,15510) 2920,15510 2920,13145 ccw(c2970,13145)
no net on Bottom Layer "gnd3" (solid, remove dead copper, pour order 6): 6985,9500 8807.6,9500 ccw(c8807.6,9557.4) 8865,9557.4 8865,11875.51 ccw(c8775.52,11875.51) 8775.52,11964.99 6984.99,11964.99 ccw(c6984.99,11915) 6935,11915 6935,9550 ccw(c6985,9550)
no net on Bottom Layer "gnd3" (solid, remove dead copper, pour order 5): 2980,9520 4802.6,9520 ccw(c4802.6,9577.4) 4860,9577.4 4860,11895.51 ccw(c4770.52,11895.51) 4770.52,11984.99 2979.99,11984.99 ccw(c2979.99,11935) 2930,11935 2930,9570 ccw(c2980,9570)
no net on Bottom Layer "gnd3" (solid, remove dead copper, pour order 4): 6995,5535 8817.6,5535 ccw(c8817.6,5592.4) 8875,5592.4 8875,7910.51 ccw(c8785.52,7910.51) 8785.52,7999.99 6994.99,7999.99 ccw(c6994.99,7950) 6945,7950 6945,5585 ccw(c6995,5585)
no net on Bottom Layer "gnd3" (solid, remove dead copper, pour order 3): 3010,5595 4832.6,5595 ccw(c4832.6,5652.4) 4890,5652.4 4890,7970.51 ccw(c4800.52,7970.51) 4800.52,8059.99 3009.99,8059.99 ccw(c3009.99,8010) 2960,8010 2960,5645 ccw(c3010,5645)
no net on Bottom Layer "gnd3" (solid, remove dead copper, pour order 2): 6995,1585 8817.6,1585 ccw(c8817.6,1642.4) 8875,1642.4 8875,3960.51 ccw(c8785.52,3960.51) 8785.52,4049.99 6994.99,4049.99 ccw(c6994.99,4000) 6945,4000 6945,1635 ccw(c6995,1635)
NetC1_7 on Bottom Layer "gnd3" (solid, remove dead copper, pour order 1): 3010,1655 4832.6,1655 ccw(c4832.6,1712.4) 4890,1712.4 4890,4030.51 ccw(c4800.52,4030.51) 4800.52,4119.99 3009.99,4119.99 ccw(c3009.99,4070) 2960,4070 2960,1705 ccw(c3010,1705)